# Altium PCB PCB1.PcbDoc (part 1 of 2)
Units mil, origin at the board's own origin, x right, y up, seen from the top; angles counter-clockwise.
Board outline 6000 x 4000 mil, 4 copper layers (Top Layer, Mid Layer 1, Mid Layer 2, Bottom Layer), stack 64.961 mil thick; 76 components, 53 nets, 288 pads, 57 vias.
Unrouted connection lines stored in the file: 62.
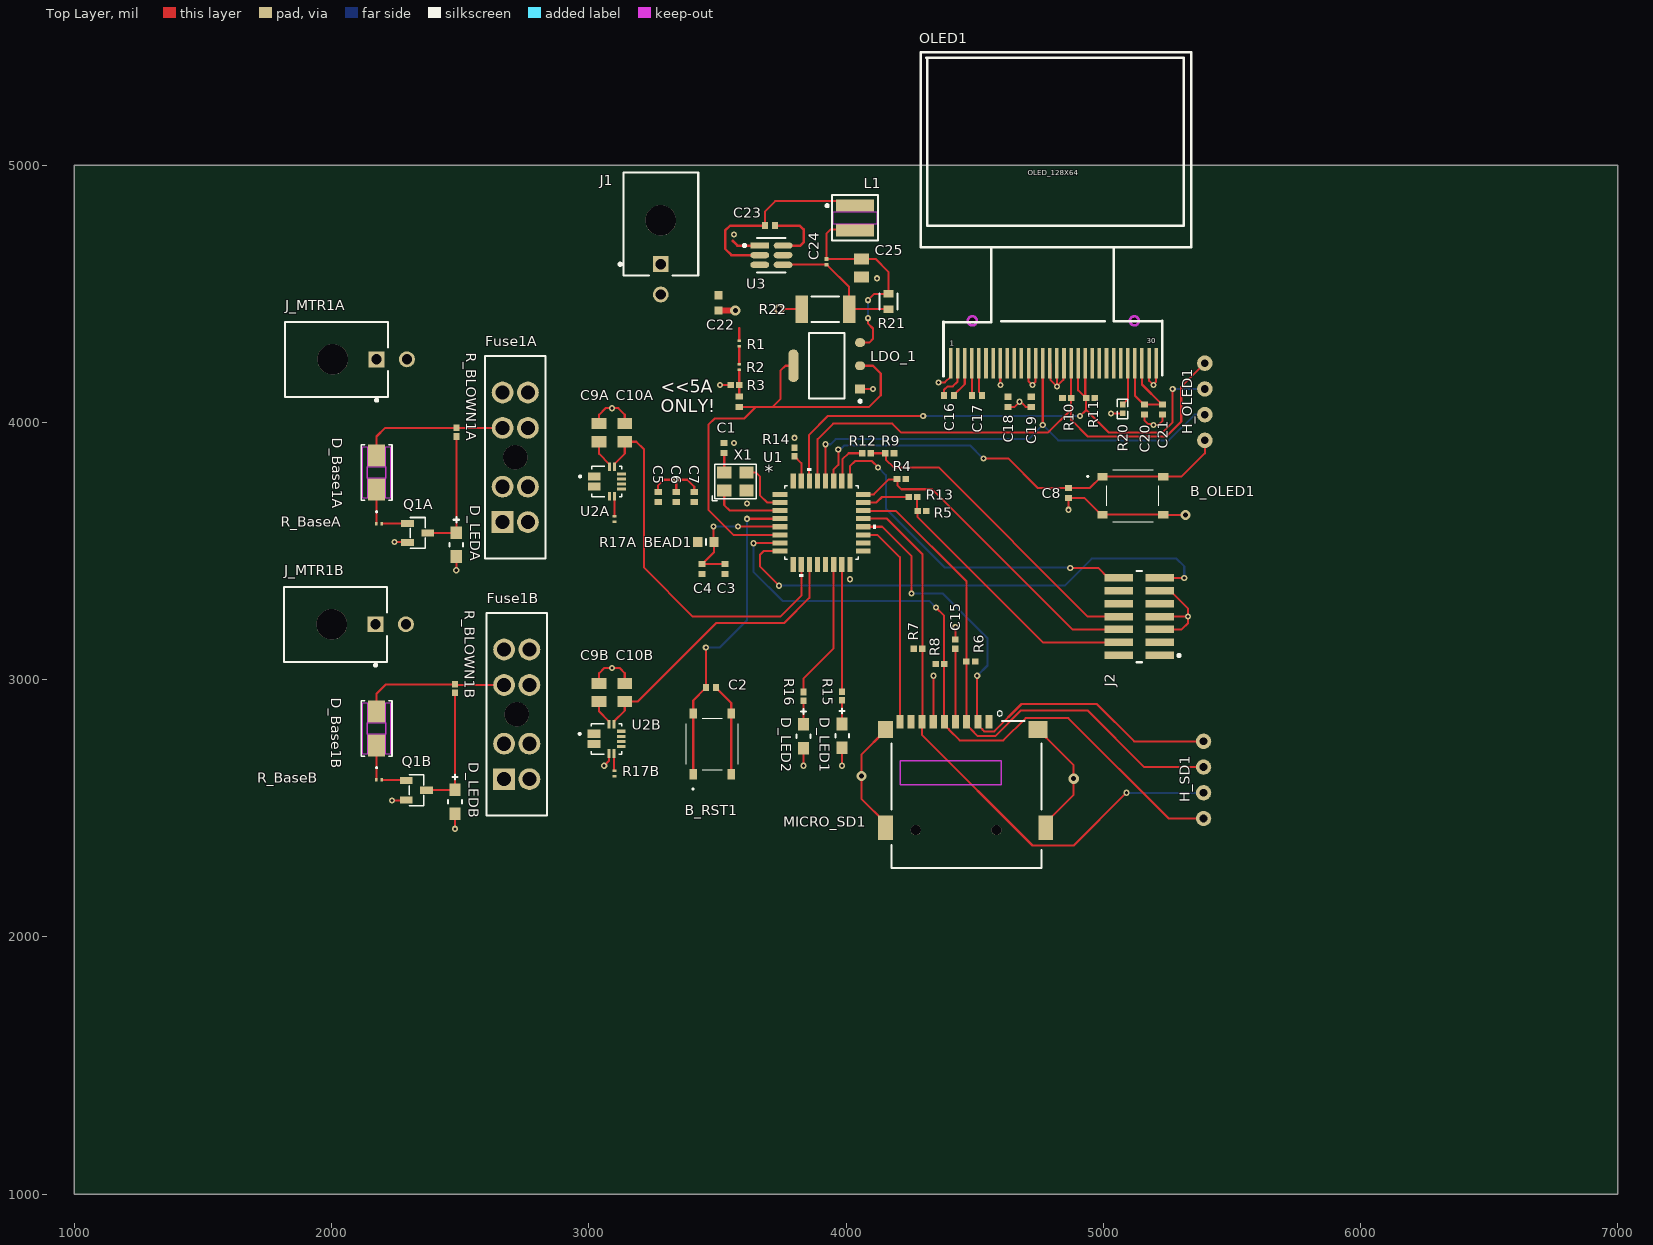
[diagram p0: Top Layer view]
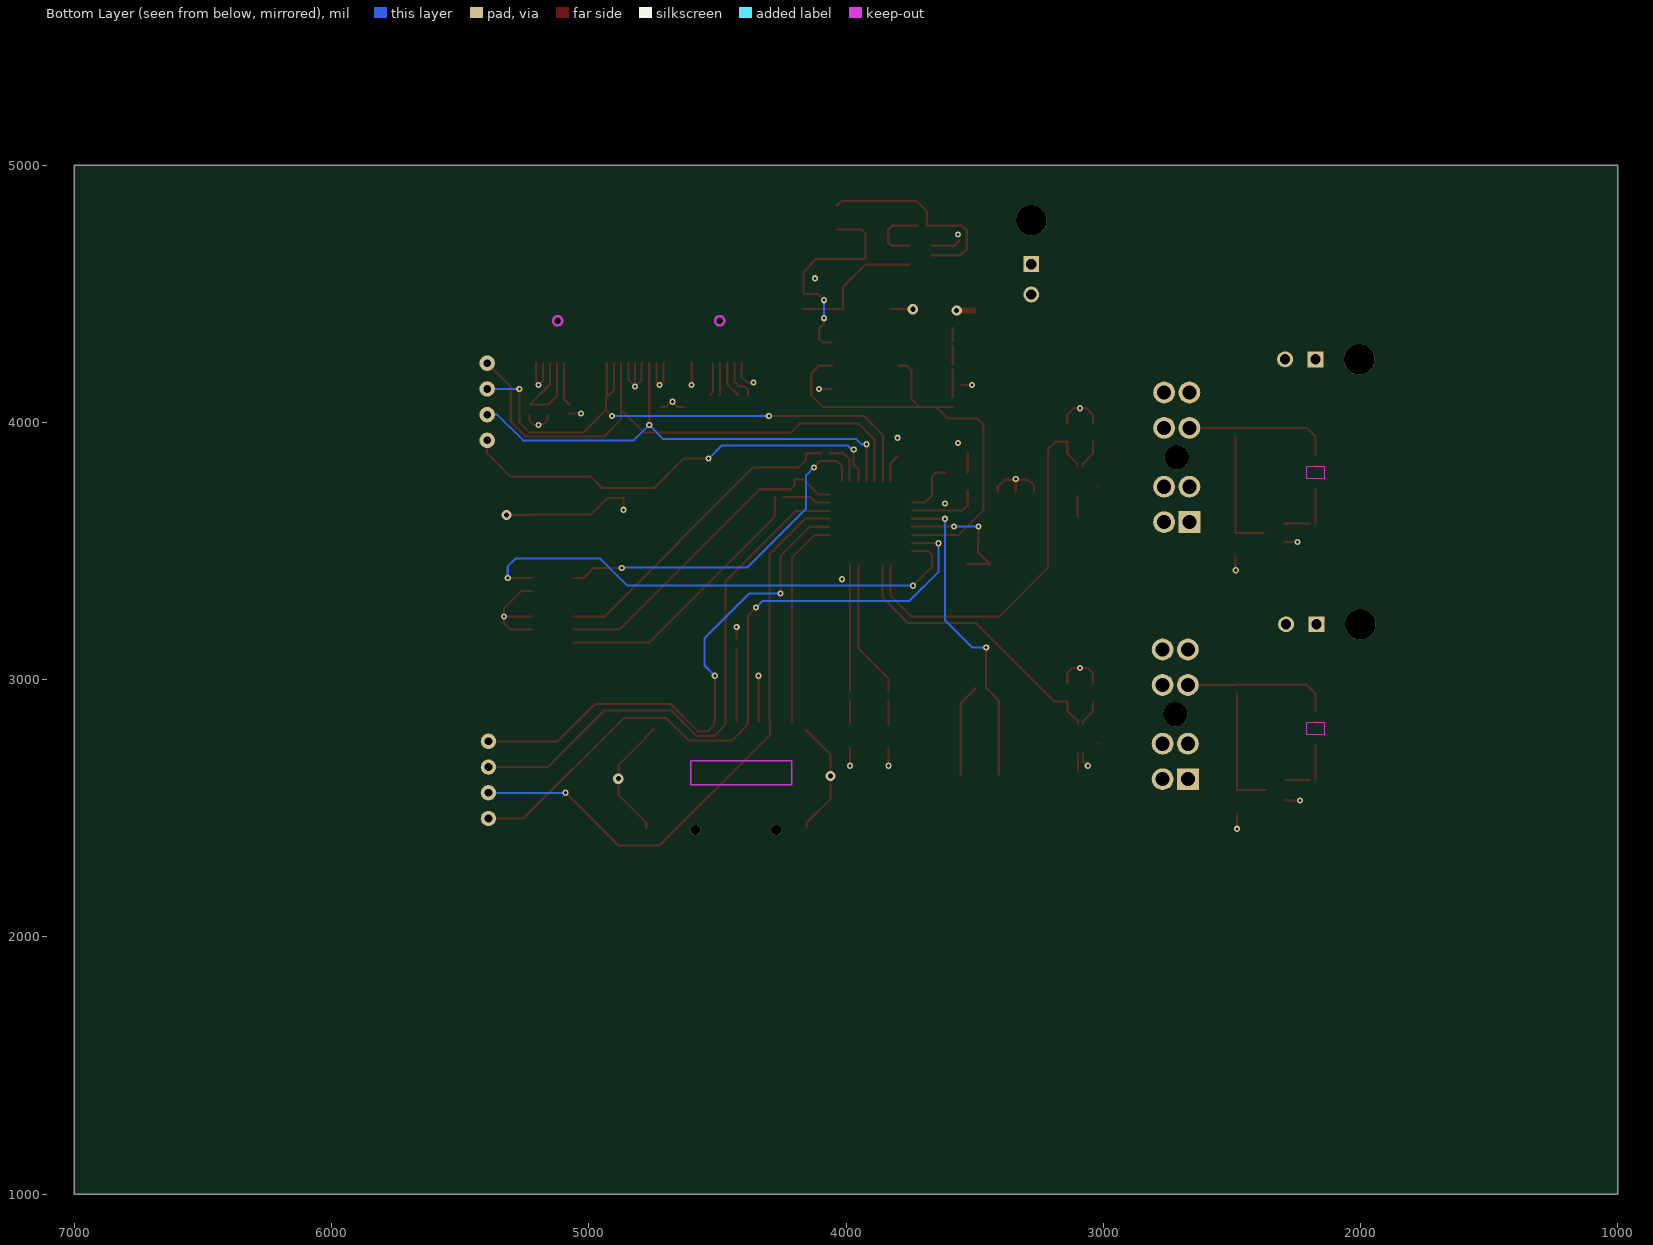
[diagram p1: Bottom Layer view, seen from below]
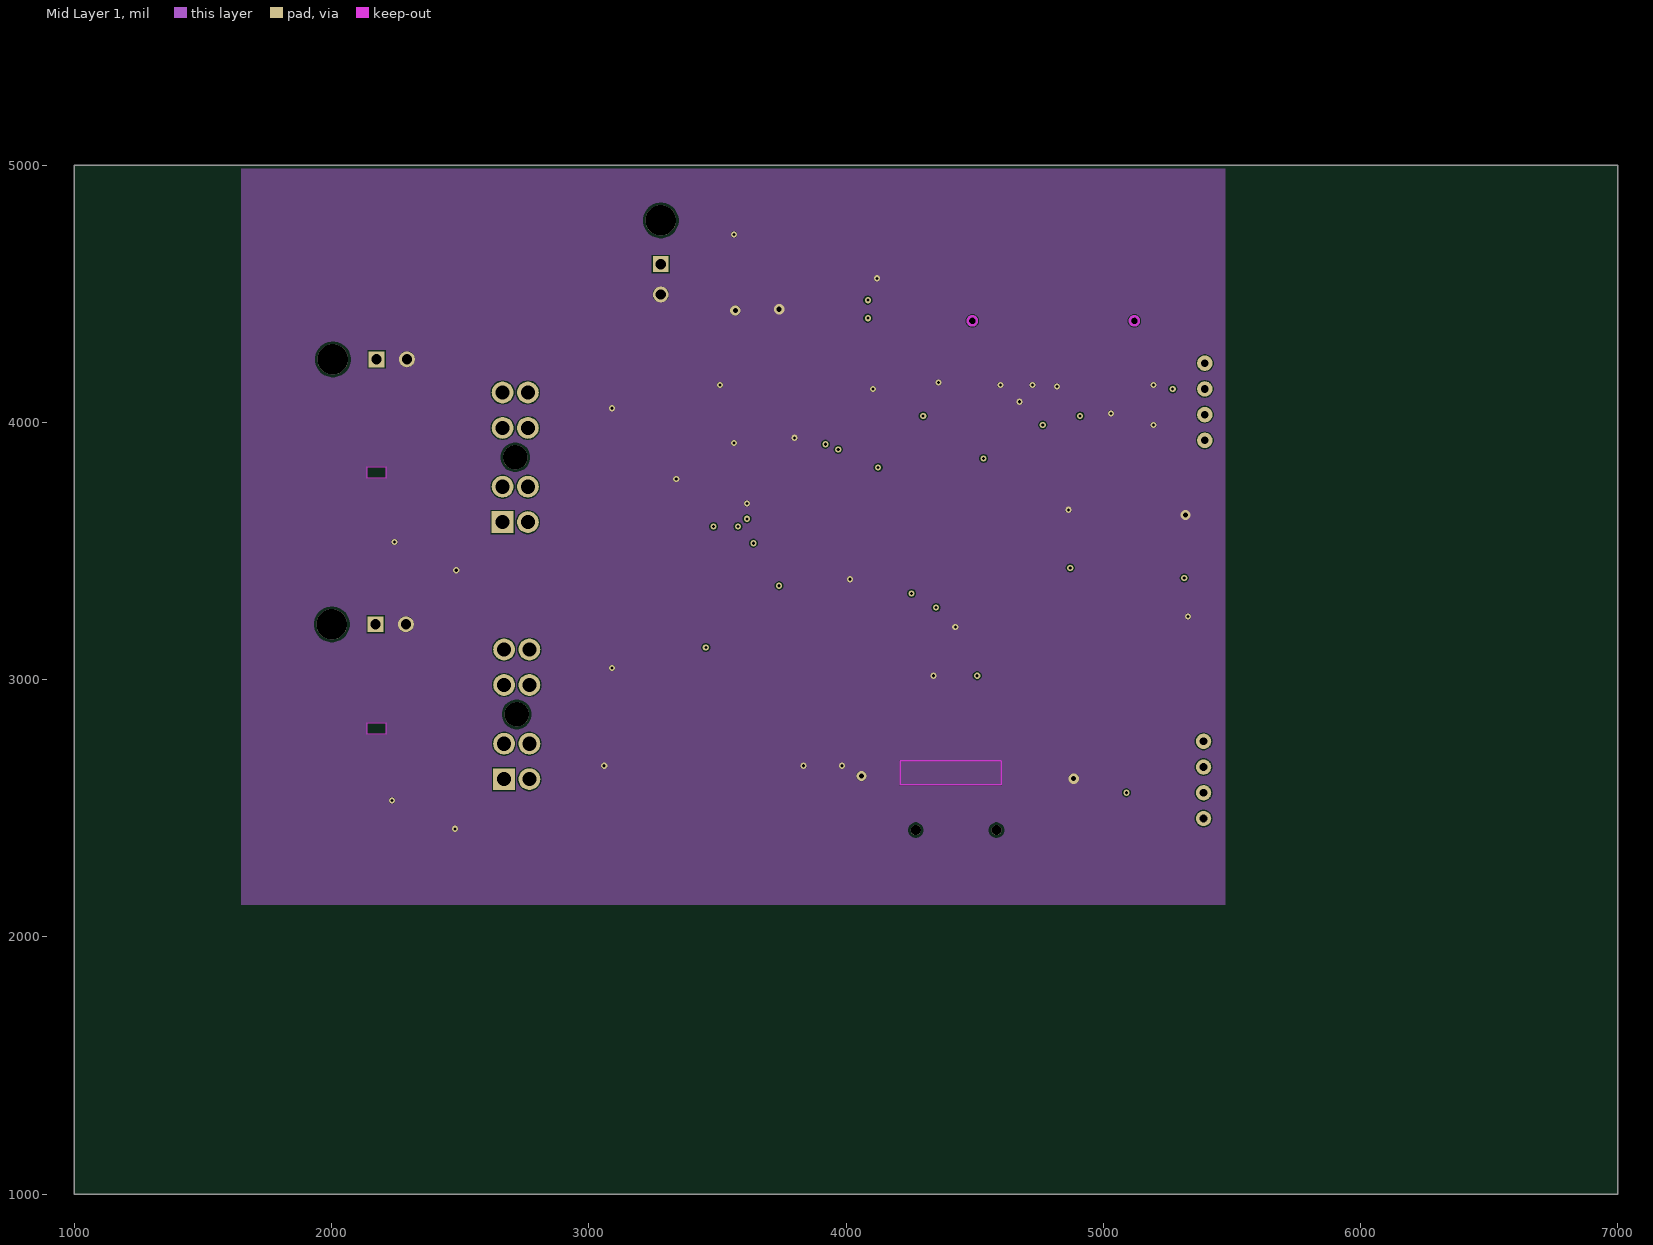
[diagram p2: Mid Layer 1]

## Layer stack, top to bottom
Top Solder: solder mask 0.5, Solder Resist, Dk 3.8
Top Layer: signal copper 2.9528
Dielectric 1: prepreg 3.937, 2313, Dk 4.05
Mid Layer 1: signal copper 0.689
Core: core 49.8031, FR-4, Dk 4.5
Mid Layer 2: signal copper 0.689
Dielectric 2: prepreg 3.937, 2313, Dk 4.05
Bottom Layer: signal copper 2.9528
Bottom Solder: solder mask 0.5, Solder Resist, Dk 3.8

## Board outline
1000,1000 7000,1000 7000,5000 1000,5000

## Design rules (kind name [scope] priority, off if disabled: settings)
BoardOutlineClearance [All] p1: gap=7.87 ignorepadtopadclearanceinfootprint=FALSE
Clearance ClearanceMidLayer1 [OnLayer('Mid Layer 1') Or IsVia Or IsThruPin vs OnLayer('Mid Layer 1')] p1: gap=4 ignorepadtopadclearanceinfootprint=FALSE except(5: Arc-Via Track-Via SMDPad-Via THPad-Via Via-Via Via-Fill Via-Poly Via-Region Via-Text; 9.84: Arc-Hole Track-Hole SMDPad-Hole THPad-Hole Via-Hole Fill-Hole Poly-Hole Region-Hole Text-Hole)
Clearance ClearanceTopLayer [OnLayer('Top Layer') Or IsVia Or IsThruPin vs OnLayer('Top Layer') Or IsVia Or IsThruPin] p2: gap=8 ignorepadtopadclearanceinfootprint=FALSE except(9.84: Arc-Hole Track-Hole SMDPad-Hole THPad-Hole Via-Hole Fill-Hole Poly-Hole Region-Hole Text-Hole)
Clearance ClearanceBottomLayer [OnLayer('Bottom Layer') Or IsVia Or IsThruPin vs OnLayer('Bottom Layer') Or IsVia Or IsThruPin] p3: gap=8 ignorepadtopadclearanceinfootprint=FALSE except(9.84: Arc-Hole Track-Hole SMDPad-Hole THPad-Hole Via-Hole Fill-Hole Poly-Hole Region-Hole Text-Hole)
Clearance ClearanceMidLayer2 [OnLayer('Mid Layer 2') Or IsVia Or IsThruPin vs OnLayer('Mid Layer 2')] p4: gap=4 ignorepadtopadclearanceinfootprint=FALSE except(5: Arc-Via Track-Via SMDPad-Via THPad-Via Via-Via Via-Fill Via-Poly Via-Region Via-Text; 9.84: Arc-Hole Track-Hole SMDPad-Hole THPad-Hole Via-Hole Fill-Hole Poly-Hole Region-Hole Text-Hole)
ComponentClearance [All] p1: gap=4 collisioncheckmode=3 verticalgap=4 showdistances=TRUE
DiffPairsRouting [All] p1: maxlimit=8 minlimit=4 mostfreqgap=8 toplayer_mingap=8 toplayer_minwidth=8 toplayer_maxwidth=71497.94 toplayer_prefwidth=8 midlayer1_maxgap=4 midlayer1_prefgap=4 midlayer1_minwidth=4 midlayer1_maxwidth=71497.94 midlayer1_prefwidth=4 midlayer2_maxgap=4 midlayer2_prefgap=4 midlayer2_minwidth=4 midlayer2_maxwidth=71497.94 midlayer2_prefwidth=4 bottomlayer_mingap=8 bottomlayer_minwidth=8 bottomlayer_maxwidth=71497.94 bottomlayer_prefwidth=8 maxuncoupledlength=500
Height [All] p1: minheight=0 maxheight=71497.94 prefheight=500
HoleSize [All] p1: absolutevalues=TRUE maxlimit=248.03 minlimit=7.87 maxpercent=80.000 minpercent=20.000
HoleToHoleClearance [All] p1: gap=9.84 allowstackedmicrovias=FALSE
MinimumAnnularRing [All] p1: minimumring=3
MinimumSolderMaskSliver [All] p1: minsoldermaskwidth=0
PlaneClearance PlaneClearanceMidLayer1 [OnLayer('Mid Layer 1')] p1: clearance=4
PlaneClearance PlaneClearanceMidLayer2 [OnLayer('Mid Layer 2')] p2: clearance=4
PlaneClearance PlaneClearanceTopLayer [OnLayer('Top Layer')] p3: clearance=8
PlaneClearance PlaneClearanceBottomLayer [OnLayer('Bottom Layer')] p4: clearance=8
PlaneConnect PlaneConnectPowerPads [InPadClass('PowerPads')] p1: planeconnectstyle=Direct reliefexpansion=20 reliefentries=4 reliefconductorwidth=10 reliefairgap=10
PlaneConnect PlaneConnectTopLayer [OnLayer('Top Layer')] p2: pad.planeconnectstyle=Relief pad.reliefexpansion=11.81 pad.reliefentries=4 pad.reliefconductorwidth=8 pad.reliefairgap=8 via.planeconnectstyle=Direct via.reliefexpansion=11.81 via.reliefentries=4 via.reliefconductorwidth=5 via.reliefairgap=5
PlaneConnect PlaneConnectBottomLayer [OnLayer('Bottom Layer')] p3: pad.planeconnectstyle=Relief pad.reliefexpansion=11.81 pad.reliefentries=4 pad.reliefconductorwidth=8 pad.reliefairgap=8 via.planeconnectstyle=Direct via.reliefexpansion=11.81 via.reliefentries=4 via.reliefconductorwidth=5 via.reliefairgap=5
PlaneConnect PlaneConnectMidLayer1 [OnLayer('Mid Layer 1')] p4: pad.planeconnectstyle=Relief pad.reliefexpansion=11.81 pad.reliefentries=4 pad.reliefconductorwidth=4 pad.reliefairgap=4 via.planeconnectstyle=Direct via.reliefexpansion=11.81 via.reliefentries=4 via.reliefconductorwidth=5 via.reliefairgap=5
PlaneConnect PlaneConnectMidLayer2 [OnLayer('Mid Layer 2')] p5: pad.planeconnectstyle=Relief pad.reliefexpansion=11.81 pad.reliefentries=4 pad.reliefconductorwidth=4 pad.reliefairgap=4 via.planeconnectstyle=Direct via.reliefexpansion=11.81 via.reliefentries=4 via.reliefconductorwidth=5 via.reliefairgap=5
PolygonConnect PolygonConnectPowerPads [All vs (InPadClass('PowerPads'))] p1: connectstyle=Direct reliefconductorwidth=10 reliefentries=4 polygonreliefangle="90 Angle" airgapwidth=10
PolygonConnect PolygonConnectMidLayer1 [OnLayer('Mid Layer 1') vs OnLayer('Mid Layer 1')] p2: thpad.connectstyle=Relief thpad.reliefconductorwidth=4 thpad.reliefentries=4 thpad.polygonreliefangle="90 Angle" thpad.airgapwidth=4 smdpad.connectstyle=Relief smdpad.reliefconductorwidth=4 smdpad.reliefentries=4 smdpad.polygonreliefangle="90 Angle" smdpad.airgapwidth=4 via.connectstyle=Direct via.reliefconductorwidth=5 via.reliefentries=4 via.polygonreliefangle="90 Angle" via.airgapwidth=5
PolygonConnect PolygonConnectMidLayer2 [OnLayer('Mid Layer 2') vs OnLayer('Mid Layer 2')] p3: thpad.connectstyle=Relief thpad.reliefconductorwidth=4 thpad.reliefentries=4 thpad.polygonreliefangle="90 Angle" thpad.airgapwidth=4 smdpad.connectstyle=Relief smdpad.reliefconductorwidth=4 smdpad.reliefentries=4 smdpad.polygonreliefangle="90 Angle" smdpad.airgapwidth=4 via.connectstyle=Direct via.reliefconductorwidth=5 via.reliefentries=4 via.polygonreliefangle="90 Angle" via.airgapwidth=5
PolygonConnect PolygonConnectTopLayer [OnLayer('Top Layer') vs OnLayer('Top Layer')] p4: thpad.connectstyle=Relief thpad.reliefconductorwidth=8 thpad.reliefentries=4 thpad.polygonreliefangle="90 Angle" thpad.airgapwidth=8 smdpad.connectstyle=Relief smdpad.reliefconductorwidth=8 smdpad.reliefentries=4 smdpad.polygonreliefangle="90 Angle" smdpad.airgapwidth=8 via.connectstyle=Direct via.reliefconductorwidth=5 via.reliefentries=4 via.polygonreliefangle="90 Angle" via.airgapwidth=5
PolygonConnect PolygonConnectBottomLayer [OnLayer('Bottom Layer') vs OnLayer('Bottom Layer')] p5: thpad.connectstyle=Relief thpad.reliefconductorwidth=8 thpad.reliefentries=4 thpad.polygonreliefangle="90 Angle" thpad.airgapwidth=8 smdpad.connectstyle=Relief smdpad.reliefconductorwidth=8 smdpad.reliefentries=4 smdpad.polygonreliefangle="90 Angle" smdpad.airgapwidth=8 via.connectstyle=Direct via.reliefconductorwidth=5 via.reliefentries=4 via.polygonreliefangle="90 Angle" via.airgapwidth=5
RoutingVias [All] p1: holewidth=7.87 width=17.72 viastyle="Through Hole" minholewidth=7.87 minwidth=17.72 maxholewidth=248.03 maxwidth=257.87
SilkToSilkClearance [All] p1: silktosilkclearance=0
SilkToSolderMaskClearance [IsPad] p1: minsilkscreentomaskgap=4 clearancetoexposedcopper=TRUE
SolderMaskExpansion [All] p1: expansion=2.95 istentingtop=FALSE
SupplyNets "Schematic Supply Nets_3" [InNet('3V3')] p1: voltage=0.000
SupplyNets "Schematic Supply Nets_2" [InNet('26V1')] p2: voltage=0.000
SupplyNets "Schematic Supply Nets_1" [InNet('GND')] p3: voltage=0.000
SupplyNets "Schematic Supply Nets" [InNet('AVDD')] p4: voltage=0.000
Width [All] p1: maxlimit=71497.94 minlimit=4 preferedwidth=8 toplayer_minwidth=8 midlayer1_prefwidth=4 midlayer2_prefwidth=4 bottomlayer_minwidth=8 minimp=50.000000 maximp=50.000000 favimp=50.000000
20 further rules are at their usual default settings.

## Classes and differential pairs
channel class Fuse: F1 F2
channel class Ammeter: I1 I2
net class Vi_motor[1..2]: Vi_motor1 Vi_motor2
component class Power: J1 R1 R2 R3
component class MCU: B_OLED1 B_RST1 BEAD1 C1 C2 C3 C4 C5 C6 C7 C8 D5 D6 D_LED1 D_LED2 H_OLED1 H_SD1 R4 R5 R6 R7 R8 R9 R10 R11 R12 R13 R14 R15 R16 U1 X1
component class "Mass Storage": C15 MICRO_SD1
component class I2: C9B C10B R17B U2B
component class I1: C9A C10A R17A U2A
component class F2: D1B D_Base1B D_LEDB Fuse1B J_MTR1B Q1B R_BaseB R_BLOWN1B
component class F1: D1A D_Base1A D_LEDA Fuse1A J_MTR1A Q1A R_BaseA R_BLOWN1A
component class Debugger: J2
component class Buck+LDO: C22 C23 C24 C25 L1 LDO_1 R21 R22 U3
component class "128x64 OLED": C16 C17 C18 C19 C20 C21 OLED1 R20

## Components (designator, comment, footprint, x,y, rotation, side; value= is the part's Value field where it differs from the comment)
B_OLED1 "Button" TS1187ABAB 5115,3715 r0 top (schematic designator B_OLED_ON/OFF1)
B_RST1 "Button" TS1187ABAB 3480,2750 r90 top
BEAD1 "GZ1608D601TF" BEADC1608X95N 3455,3535 r0 top
C1 "CL05B103KB5NNNC" CAP-0402 3525,3900 r270 top
C2 "CL05B104KB54PNC" CAP-0402 3475,2970 r180 top
C3 "CL05A105KA5NQNC" CAP-0402 3530,3430 r90 top
C4 "CL05B103KB5NNNC" CAP-0402 3440,3430 r90 top
C5 "CL05A475MP5NRNC" CAP-0402 3270,3710 r270 top
C6 "CL05B104KO5NNNC" CAP-0402 3340,3710 r270 top
C7 "CL05B104KO5NNNC" CAP-0402 3410,3709.69 r270 top
C8 "CL05B103KB5NNNC" CAP-0402 4865,3725 r90 top
C9A "CC0805KRX7R9BB104" CAP-0805 3040,3960 r270 top (schematic designator C9)
C9B "CC0805KRX7R9BB104" CAP-0805 3040,2950 r270 top (schematic designator C9)
C10A "CL21B102KBCNNNC" CAP-0805 3140,3960 r270 top (schematic designator C10)
C10B "CL21B102KBCNNNC" CAP-0805 3140,2950 r270 top (schematic designator C10)
C15 "0.1uF Ceramic Capacitor" CAPC1005X55N 4425,3138.11 r90 top value=0.1uF
C16 "CL05A225MQ5NSNC" CAP-0402 4400,4105 r180 top
C17 "CL05A225MQ5NSNC" CAP-0402 4509.69,4105 r180 top
C18 "CL05B104KO5NNNC" CAP-0402 4630,4080 r90 top
C19 "CL05A106MQ5NUNC" CAP-0402 4720,4080 r90 top
C20 "CL05A106MQ5NUNC" CAP-0402 5160,4049.68 r90 top
C21 "CL05A106MQ5NUNC" CAP-0402 5230,4050 r90 top
C22 "885012106009" WCAP-CSGP_0603_L1.6W0.8H0.8_Reflow 3505,4464.53 r90 top
C23 "CL05B104KO5NNNC" CAP-0402 3705,4765 r180 top
C24 "CGA1A2C0G1E680J030BA" CAPC0603X33N 3925,4623.94 r90 top
C25 "CL21A476MQYNNNE" CAP-0805 4060,4600 r90 top
D_Base1A "Diode" M7_MDD 2175,3805 r90 top (schematic designator D_Base1)
D_Base1B "Diode" M7_MDD 2175,2810 r90 top (schematic designator D_Base1)
D_LED1 "" FP-AP2012EC-MFG 3985,2781.26 r270 top
D_LED2 "" FP-AP2012EC-MFG 3835,2780 r270 top
D_LEDA "" FP-AP2012EC-MFG 2485,3525 r270 top (schematic designator D_LED)
D_LEDB "" FP-AP2012EC-MFG 2480,2525 r270 top (schematic designator D_LED)
Fuse1A "178.6165.0002" FP-178_6165-MFG 2714.21,3864.17 r90 top (schematic designator Fuse1)
Fuse1B "178.6165.0002" FP-178_6165-MFG 2720,2865 r90 top (schematic designator Fuse1)
H_OLED1 "4-pin Header" "4-pin Header" 5395,4230 r180 top
H_SD1 "4-pin Header" "4-pin Header" 5390,2460 r0 top
J1 "43045-0201" FP-43045-0201-MFG 3280,4771.1 r180 top
J2 "FTSH-107-01-L-DV-K" FP-FTSH-107-01-L-DV-K-MFG 5140,3245 r90 top
J_MTR1A "43045-0201" FP-43045-0201-MFG 2018.9,4245 r270 top (schematic designator J_MTR1)
J_MTR1B "43045-0201" FP-43045-0201-MFG 2015,3215 r270 top (schematic designator J_MTR1)
L1 "74439325056" WE-XHMI_4040 4035,4795 r0 top
LDO_1 "AMS1117-3.3" FP-AMS1117-IPC_C 3925,4220 r180 top
MICRO_SD1 "TF-01A" TF-01A 4468,2554 r0 top
OLED1 "N096-2864KSWEG01-H30" OLED_0.96-30P-P0.70-12864 4806.1,4229.99 r0 top
Q1A "SS8050" SOT-23-3_L2.9-W1.3-P1.90-LS2.4-BR 2335,3570 r180 top (schematic designator Q1)
Q1B "SS8050" SOT-23-3_L2.9-W1.3-P1.90-LS2.4-BR 2330,2570 r180 top (schematic designator Q1)
R1 "0603WAF3003T5E" RES-0603 3585,4305.83 r90 top
R2 "0603WAF5103T5E" RES-0603 3585,4215.83 r90 top
R3 "0402WGF1003TCE" RES-0402 3568.27,4145 r0 top
R4 "0402WGF1002TCE" RES-0402 4215,3780 r0 top
R5 "0402WGF1002TCE" RES-0402 4295,3655 r0 top
R6 "0402WGF1002TCE" RES-0402 4485,3070 r0 top
R7 "0402WGF1002TCE" RES-0402 4280,3120 r180 top
R8 "0402WGF1002TCE" RES-0402 4365,3060 r180 top
R9 "0402WGF1002TCE" RES-0402 4170,3880 r0 top
R10 "0402WGF1002TCE" RES-0402 4858.27,4095 r180 top
R11 "0402WGF1002TCE" RES-0402 4950,4095 r0 top
R12 "0402WGF220JTCE" RES-0402 4080,3880 r0 top
R13 "0402WGF220JTCE" RES-0402 4260,3710 r0 top
R14 "0402WGF1002TCE" RES-0402 3800,3885 r270 top
R15 "0402WGF1000TCE" RES-0402 3985,2936.73 r270 top
R16 "0402WGF1000TCE" RES-0402 3835,2935 r270 top
R17A "0603WAF1001T5E" RES-0603 3100,3624.17 r270 top (schematic designator R17)
R17B "0603WAF1001T5E" RES-0603 3100,2635 r270 top (schematic designator R17)
R20 "390kΩ" R0402 5075,4052.04 r90 top
R21 "" FP-CRCW0603-e3-MFG 4165,4470 r270 top
R22 "13K7 1% 2010(5025)" RESC2010(5025)_N 3920,4440 r0 top value="13700.00 Ohm"
R_BaseA "0603WAF1002T5E" RES-0603 2185,3605 r180 top (schematic designator R_Base)
R_BaseB "0603WAF1002T5E" RES-0603 2185,2610 r180 top (schematic designator R_Base)
R_BLOWN1A "0402WGF1202TCE" RES-0402 2485,3961.73 r90 top (schematic designator R_BLOWN1)
R_BLOWN1B "0402WGF1202TCE" RES-0402 2480,2965 r90 top (schematic designator R_BLOWN1)
U1 "STM32L412KBT6" LQFP-32 3905,3610 r0 top
U2A "ACS711KEXLT-15AB-T" XDCR_ACS711KEXLT-15AB-T 3070,3770 r0 top (schematic designator U2)
U2B "ACS711KEXLT-15AB-T" XDCR_ACS711KEXLT-15AB-T 3068.62,2769.68 r0 top (schematic designator U2)
U3 "" FP-DDC0006A-IPC_A 3710,4650 r0 top
X1 "32.768kHz" OSC-SMD_4P-L3.2-W2.5-BL 3570,3770 r0 top

## Footprints (in the part's own frame and the unit in brackets; to place one, negate y for a bottom-side part, rotate by r counter-clockwise, add the part's x,y. Pads: shape width x height; smd on the part's side, far side on the other; paste and mask are expansions set on the pad)
"4-pin Header" [mil]
  round 60 hole 30: 1(0,0) 2(0,100) 3(0,200) 4(0,300)
BEADC1608X95N [mm]
  rect 0.9x1 smd: 1(-0.8,0) 2(0.8,0)
  silkscreen extent 0,-0.3 0,0.3, body extent -0.8,-0.4 0.8,0.4, height 0.95
CAP-0402 [mm]
  rect 0.6x0.7 smd: 1(-0.5,0) 2(0.5,0)
  body extent -0.5,-0.25 0.5,0.25, height 0.3
CAP-0805 [mm] "Chip Capacitor, 2-Leads, Body 2.00x1.25mm, IPC Medium Density"
  rect 1.1x1.45 smd: 1(-0.9,0) 2(0.9,0)
  body extent -1.05,-0.7 1.05,0.7, height 0.6
CAPC0603X33N [mm]
  rect 0.38x0.4 smd: 1(-0.281,0) 2(0.281,0)
  body extent -0.3,-0.15 0.3,0.15, height 0.33
CAPC1005X55N [mm]
  rect 0.6x0.62 smd: 1(-0.46,0) 2(0.46,0)
  body extent -0.5,-0.25 0.5,0.25, height 0.55
FP-178_6165-MFG [mm]
  round 2.15 hole 1.4 paste-2539.97 mask+0: 1(-6.4,-1.25) 1(-2.9,-1.25) 1(-2.9,1.25) 2(2.9,-1.25) 2(2.9,1.25) 2(6.4,-1.25) 2(6.4,1.25)
  rect 2.15x2.15 hole 1.4 paste-2539.97 mask+0: 1(-6.4,1.25)
  round 2.4 hole 2.4 unplated paste-2539.97 mask+0: ""(0,0)
  silkscreen extent -10,-3 10,3, body extent -10.1,-3.1 10.1,3.1, height 0.25
FP-43045-0201-MFG [mm]
  rect 1.57x1.57 hole 1.02 paste-2539.97 mask+0: 1(0,3.965)
  round 1.57 hole 1.02 paste-2539.97 mask+0: 2(0,6.965)
  round 3 hole 3 unplated paste-2539.97 mask+0: ""(0,-0.355)
  silkscreen extent -3.7,-5.08 4.15,5.08, body extent -3.8,-5.18 3.8,7.85, height 0.25
FP-AMS1117-IPC_C [mm]
  rect 1.004x0.872 smd paste+0 mask+0: 1(-3.295,2.29)
  rrect100% 1.004x0.872 smd paste+0 mask+0: 2(-3.295,0) 3(-3.295,-2.29)
  rrect87% 1.004x3.182 smd paste+0 mask+0: 4(3.295,0)
  silkscreen extent -3.42,-3.25 1.75,3.62, body extent -3.9,-3.35 3.9,3.35, height 0.25
FP-AP2012EC-MFG [mm]
  rect 1.25x1.1 smd paste+0 mask+0: 1(-1.175,0) 2(1.175,0)
  silkscreen extent -2.7,-0.67 0.18,0.67, body extent -1.9,-0.77 1.9,0.77, height 0.25
FP-CRCW0603-e3-MFG [mm]
  rect 0.75x1 smd paste+0 mask+0: 1(-0.75,0) 2(0.75,0)
  silkscreen extent -0.8,-0.9 0.8,0.9, body extent -1.22,-0.6 1.22,0.6, height 0.25
FP-DDC0006A-IPC_A [mm]
  rect 1.854x0.612 smd paste+0 mask+0: 1(-1.15,0.95)
  rrect100% 1.854x0.612 smd paste+0 mask+0: 2(-1.15,0) 3(-1.15,-0.95) 4(1.15,-0.95) 5(1.15,0) 6(1.15,0.95)
  silkscreen extent -2.77,-1.7 1.4,1.7, body extent -2.58,-1.95 2.58,1.95, height 0.25
FP-FTSH-107-01-L-DV-K-MFG [mm]
  rect 0.74x2.79 smd paste+0 mask+0: 1(-3.81,-2.035) 2(-3.81,2.035) 3(-2.54,-2.035) 4(-2.54,2.035) 5(-1.27,-2.035) 6(-1.27,2.035) 7(0,-2.035) 8(0,2.035) 9(1.27,-2.035) 10(1.27,2.035) 11(2.54,-2.035) 12(2.54,2.035) 13(3.81,-2.035) 14(3.81,2.035)
  silkscreen extent -4.51,-4.04 4.51,0.27, body extent -4.61,-3.53 4.61,3.53, height 0.25
LQFP-32 [mil]
  rect 58x20 smd paste+0 mask+0: 1(-162,110.24) 2(-162,78.74) 3(-162,47.24) 4(-162,15.75) 5(-162,-15.75) 6(-162,-47.24) 7(-162,-78.74) 8(-162,-110.24) 17(162,-110.24) 18(162,-78.74) 19(162,-47.24) 20(162,-15.75) 21(162,15.75) 22(162,47.24) 23(162,78.74) 24(162,110.24)
  rect 20x58 smd paste+0 mask+0: 9(-110.24,-162) 10(-78.74,-162) 11(-47.24,-162) 12(-15.75,-162) 13(15.75,-162) 14(47.24,-162) 15(78.74,-162) 16(110.24,-162) 25(110.24,162) 26(78.74,162) 27(47.24,162) 28(15.75,162) 29(-15.75,162) 30(-47.24,162) 31(-78.74,162) 32(-110.24,162)
  silkscreen extent -143,-211 211,211, body extent -177,-177 177,177, height 63
M7_MDD [mil]
  rect 85x67 smd paste+0 mask+0: 1(-66,0) 2(66,0)
  Top Layer keep-out region: -21.5,-35.5 -21.5,35.5 21.5,35.5 21.5,-35.5
  Top Layer keep-out region: -100.5,35.5 -100.5,53 100.5,53 100.5,35.5
  Top Layer keep-out region: -100.5,-53 -100.5,-35.5 100.5,-35.5 100.5,-53
  Keep-Out Layer region: -21.5,-35.5 -21.5,35.5 21.5,35.5 21.5,-35.5
  silkscreen extent -155,-60 108,60, body extent -103,-55 103,55, height 89
OLED_0.96-30P-P0.70-12864 [mm]
  rect 0.351x3 smd: 1(-10.15,0.002) 2(-9.45,0) 3(-8.75,0) 4(-8.05,0) 5(-7.35,0) 6(-6.65,0) 7(-5.95,0) 8(-5.25,0) 9(-4.55,0) 10(-3.85,0) 11(-3.15,0) 12(-2.45,0) 13(-1.75,0) 14(-1.05,0) 15(-0.35,0) 16(0.35,0) 17(1.05,0) 18(1.75,0) 19(2.45,0) 20(3.15,0) 21(3.85,0) 22(4.55,0) 23(5.25,0) 24(5.95,0) 25(6.65,0) 26(7.35,0) 27(8.05,0) 28(8.75,-0.001) 29(9.45,-0.002) 30(10.15,-0.002)
  Keep-Out Layer board cut-out: 8.45,4.18 8.449,4.269 8.379,4.431 8.252,4.555 8.089,4.623 7.912,4.623 7.748,4.556 7.621,4.431 7.552,4.269 7.55,4.18 7.552,4.092 7.621,3.929 7.748,3.805 7.911,3.738 8.089,3.738 8.252,3.805 8.379,3.929 8.448,4.092 8.45,4.18 8.45,4.18
  Keep-Out Layer board cut-out: -7.55,4.18 -7.551,4.269 -7.621,4.431 -7.747,4.555 -7.911,4.623 -8.088,4.623 -8.252,4.556 -8.379,4.431 -8.448,4.269 -8.45,4.18 -8.448,4.092 -8.379,3.929 -8.252,3.805 -8.089,3.738 -7.911,3.738 -7.748,3.805 -7.621,3.929 -7.551,4.092 -7.55,4.18 -7.55,4.18
  Keep-Out Layer circle w0.254: c8,4.18 r0.45
  Keep-Out Layer circle w0.025: c8,4.18 r0.45
  Keep-Out Layer circle w0.254: c-8,4.18 r0.45
  Keep-Out Layer circle w0.025: c-8,4.18 r0.45
  silkscreen extent -13.1,-1.3 13.6,30.7
OSC-SMD_4P-L3.2-W2.5-BL [mm]
  rect 1.4x1.2 smd: 1(-1.1,-0.875) 2(1.1,-0.875) 3(1.1,0.875) 4(-1.1,0.875)
  silkscreen extent -2.29,-1.9 2.07,1.72
R0402 [mm]
  rect 0.566x0.54 smd paste-100 mask+0.051: 1(-0.433,0) 2(0.433,0)
  silkscreen extent -0.94,-0.5 0.94,0.5
RES-0402 [mm] "Chip Resistor, 2-Leads, Body 1.00x0.50mm, IPC Medium Density"
  rect 0.65x0.6 smd: 1(-0.425,0) 2(0.425,0)
  body extent -0.55,-0.3 0.55,0.3, height 0.6
RES-0603 [mm]
  rect 0.25x0.35 smd: 1(-0.275,0) 2(0.275,0)
  body extent -0.3,-0.15 0.3,0.15, height 0.3
RESC2010(5025)_N [mm] "Chip Resistor, Body 5.0x2.5mm, IPC Medium Density"
  rect 1.25x2.7 smd: 1(-2.35,0) 2(2.35,0)
  silkscreen extent -1.35,-1.25 1.35,1.25, body extent -2.6,-1.35 2.6,1.35, height 0.71
SOT-23-3_L2.9-W1.3-P1.90-LS2.4-BR [mm]
  rect 1.25x0.7 smd: 1(1,-0.95) 2(1,0.95) 3(-1,0)
  silkscreen extent -0.73,-1.53 0.73,1.53
TF-01A [mm]
  rect 0.7x1.3 smd: 1(2.23,7.174) 2(1.13,7.174) 3(0.03,7.174) 4(-1.07,7.174) 5(-2.17,7.174) 6(-3.27,7.174) 7(-4.37,7.174) 8(-5.47,7.174) CD1(-6.57,7.174)
  rect 1.448x1.651 smd: MP1(-7.989,6.4)
  rect 1.448x2.438 smd: MP2(-7.989,-3.3) MP3(7.836,-3.3)
  rect 1.854x1.651 smd: MP4(7.061,6.4)
  round 1 hole 1 unplated: ""(-5.004,-3.531) ""(2.972,-3.531)
  Keep-Out Layer lines w0.127: -6.528,0.94 3.429,0.94 3.429,3.302 -6.528,3.302 -6.528,0.94
  silkscreen extent -7.4,-7.26 7.4,8.24, body extent -7.05,-4.01 9.05,11.19, height 2
TS1187ABAB [mm]
  rect 1x0.75 smd: A1(-3,1.875) B1(3,1.875) C1(-3,-1.875) D1(3,-1.875)
  silkscreen extent -4.5,-2.55 2.55,2.55, body extent -3.2,-2.55 3.3,2.55, height 1.5
WCAP-CSGP_0603_L1.6W0.8H0.8_Reflow [mm] "Ceramic Capacitors, body 1.6x0.8mm"
  rect 0.8x0.8 smd: 1(-0.75,0) 2(0.75,0)
  body extent -0.8,-0.4 0.8,0.4, height 0.8
WE-XHMI_4040 [mm] "SMD Power Inductor, body 4.30 x 4.30 mm"
  rect 3.8x1.2 smd: 1(0,1.225) 2(0,-1.225)
  Top Layer keep-out region: -2.15,0.625 2.15,0.625 2.15,-0.625 -2.15,-0.625
  silkscreen extent -2.87,-2.25 2.25,2.25, body extent -2.15,-2.15 2.15,2.15, height 4.11
XDCR_ACS711KEXLT-15AB-T [mm]
  rect 1.27x0.8 smd mask+0: 1(-1.235,0.5) 3(-1.235,-0.5)
  rect 0.3x0.85 smd mask+0.05: 5(0.25,-1.45) 6(0.75,-1.45) 11(0.75,1.45) 12(0.25,1.45)
  rect 0.85x0.3 smd mask+0.05: 7(1.45,-0.75) 8(1.45,-0.25) 9(1.45,0.25) 10(1.45,0.75)
  silkscreen extent -2.73,-1.5 1.5,1.5, body extent -1.5,-1.5 1.5,1.5, height 0.8

## Part data
B_OLED1 B_RST1: library part TS-1187A-B-A-B, Manufacturer_Name="XKB Connectivity", Datasheet Link=http://www.helloxkb.com/public/images/pdf/TS-1187A-X-X-X.pdf, Height=4.05mm, Manufacturer_Part_Number=TS-1187A-B-A-B
BEAD1: "Ferrite Bead", Manufacturer_Name=SUNLORD, Datasheet Link=https://datasheet.lcsc.com/szlcsc/Sunlord-GZ1608D601TF_C1002.pdf, Height=0.95mm, Manufacturer_Part_Number=GZ1608D601TF
C1 C4 C8: "Capacitor, Ceramic (MLCC), 10nF, ±10%, 50V, X7R, ±10%, SMD 0402", Capacitance=10nF, Capacitance @ 1.2V DC Bias=10.434nF, Capacitance @ 1.5V DC Bias=10.455nF, Capacitance @ 1.8V DC Bias=10.480nF, Capacitance @ 1.35V DC Bias=10.444nF, Capacitance @ 1V DC Bias=10.426nF, Capacitance @ 2.5V DC Bias=10.514nF, Capacitance @ 3.3V DC Bias=10.519nF, Capacitance @ 3.7V DC Bias=10.504nF, Capacitance @ 4.2V DC Bias=10.473nF, Capacitance @ 5V DC Bias=10.402nF, Capacitance @ 9V DC Bias=10.052nF, Capacitance @ 12V DC Bias=9.639nF, Capacitance @ 15V DC Bias=9.187nF, Capacitance @ 24V DC Bias=7.606nF, Capacitance @ 36V DC Bias=5.499nF, Capacitance @ 48V DC Bias=3.591nF, JLCPCB Basic Part=Yes, JLCPCB Part Number=C15195, Manufacturer="Samsung Electro-Mechanics", Package Size=0402, Temperature Coefficient=X7R, Temperature Rating="-55°C ~ 125°C", Tolerance=±10%, Voltage Rating=50V, Category="Capacitors - MLCC", ComponentLink1Description=Datasheet, ComponentLink1URL=https://wmsc.lcsc.com/wmsc/upload/file/pdf/v2/lcsc/2304140030_Samsung-Electro-Mechanics-CL05B103KB5NNNC_C15195.pdf, ComponentLink2Description="JLCPCB Part URL", ComponentLink2URL=https://jlcpcb.com/partdetail/C15195, ComponentLink3Description="LCSC Part URL", ComponentLink3URL=https://lcsc.com/product-detail/Multilayer-Ceramic-Capacitors-MLCC---SMD-SMT_Samsung-Electro-Mechanics-Samsung-Electro-Mechanics-CL05B103KB5NNNC_C15195.html, ComponentLink4Description="Samsung Component Library", ComponentLink4URL=https://weblib.samsungsem.com/mlcc/mlcc-ec.do?partNumber=CL05B103KB5NNN, Impedance (0V Bias) @ 1GHz=1.42Ω, Impedance (0V Bias) @ 1kHz=1.61E+04Ω, Impedance (0V Bias) @ 1MHz=17.3Ω, Impedance (0V Bias) @ 2GHz=3.22Ω, Impedance (0V Bias) @ 5GHz=6.48Ω, Impedance (0V Bias) @ 5kHz=3.27E+03Ω, Impedance (0V Bias) @ 5MHz=3.52Ω, Impedance (0V Bias) @ 10kHz=1.65E+03Ω, Impedance (0V Bias) @ 10MHz=1.77Ω, Impedance (0V Bias) @ 50kHz=335Ω, Impedance (0V Bias) @ 50MHz=0.285Ω, Impedance (0V Bias) @ 100Hz=1.57E+05Ω, Impedance (0V Bias) @ 100kHz=169Ω, Impedance (0V Bias) @ 100MHz=0.0835Ω, Impedance (0V Bias) @ 500Hz=3.19E+04Ω, Impedance (0V Bias) @ 500kHz=34.3Ω, Impedance (0V Bias) @ 500MHz=0.751Ω, Manufacturer Part Number=CL05B103KB5NNNC, RoHS=Yes, Supplier 1=LCSC, Supplier Part Number 1=C15195
C2: "Capacitor, Ceramic (MLCC), 100nF, ±10%, 50V, X7R, ±10%, SMD 0402", Capacitance=100nF, Capacitance @ 1.2V DC Bias=105.639nF, Capacitance @ 1.5V DC Bias=105.528nF, Capacitance @ 1.8V DC Bias=105.317nF, Capacitance @ 1.35V DC Bias=105.594nF, Capacitance @ 1V DC Bias=105.687nF, Capacitance @ 2.5V DC Bias=104.216nF, Capacitance @ 3.3V DC Bias=102.385nF, Capacitance @ 3.7V DC Bias=101.236nF, Capacitance @ 4.2V DC Bias=99.650nF, Capacitance @ 5V DC Bias=96.918nF, Capacitance @ 9V DC Bias=81.073nF, Capacitance @ 12V DC Bias=69.786nF, Capacitance @ 15V DC Bias=59.475nF, Capacitance @ 24V DC Bias=38.112nF, Capacitance @ 36V DC Bias=23.027nF, Capacitance @ 48V DC Bias=16.035nF, JLCPCB Basic Part=Yes, JLCPCB Part Number=C307331, Manufacturer="Samsung Electro-Mechanics", Package Size=0402, Temperature Coefficient=X7R, Temperature Rating="-55°C ~ 125°C", Tolerance=±10%, Voltage Rating=50V, Category="Capacitors - MLCC", ComponentLink1Description=Datasheet, ComponentLink1URL=https://wmsc.lcsc.com/wmsc/upload/file/pdf/v2/lcsc/2304140030_Samsung-Electro-Mechanics-CL05B104KB54PNC_C307331.pdf, ComponentLink2Description="JLCPCB Part URL", ComponentLink2URL=https://jlcpcb.com/partdetail/C307331, ComponentLink3Description="LCSC Part URL", ComponentLink3URL=https://lcsc.com/product-detail/Multilayer-Ceramic-Capacitors-MLCC---SMD-SMT_Samsung-Electro-Mechanics-Samsung-Electro-Mechanics-CL05B104KB54PNC_C307331.html, ComponentLink4Description="Samsung Component Library", ComponentLink4URL=https://weblib.samsungsem.com/mlcc/mlcc-ec.do?partNumber=CL05B104KB54PN, Impedance (0V Bias) @ 1GHz=0.87Ω, Impedance (0V Bias) @ 1kHz=1.7E+03Ω, Impedance (0V Bias) @ 1MHz=1.84Ω, Impedance (0V Bias) @ 2GHz=2Ω, Impedance (0V Bias) @ 5GHz=3.96Ω, Impedance (0V Bias) @ 5kHz=346Ω, Impedance (0V Bias) @ 5MHz=0.366Ω, Impedance (0V Bias) @ 10kHz=175Ω, Impedance (0V Bias) @ 10MHz=0.172Ω, Impedance (0V Bias) @ 50kHz=35.5Ω, Impedance (0V Bias) @ 50MHz=0.0626Ω, Impedance (0V Bias) @ 100Hz=1.66E+04Ω, Impedance (0V Bias) @ 100kHz=17.9Ω, Impedance (0V Bias) @ 100MHz=0.128Ω, Impedance (0V Bias) @ 500Hz=3.38E+03Ω, Impedance (0V Bias) @ 500kHz=3.64Ω, Impedance (0V Bias) @ 500MHz=0.487Ω, Manufacturer Part Number=CL05B104KB54PNC, RoHS=Yes, Supplier 1=LCSC, Supplier Part Number 1=C307331
C3: "Capacitor, Ceramic (MLCC), 1uF, ±10%, 25V, X5R, ±10%, SMD 0402", Capacitance=1uF, Capacitance @ 1.2V DC Bias=0.983uF, Capacitance @ 1.5V DC Bias=0.932uF, Capacitance @ 1.8V DC Bias=0.879uF, Capacitance @ 1.35V DC Bias=0.958uF, Capacitance @ 1V DC Bias=1.014uF, Capacitance @ 2.5V DC Bias=0.755uF, Capacitance @ 3.3V DC Bias=0.618uF, Capacitance @ 3.7V DC Bias=0.562uF, Capacitance @ 4.2V DC Bias=0.501uF, Capacitance @ 5V DC Bias=0.420uF, Capacitance @ 9V DC Bias=0.204uF, Capacitance @ 12V DC Bias=0.147uF, Capacitance @ 15V DC Bias=0.107uF, Capacitance @ 24V DC Bias=0.061uF, JLCPCB Basic Part=Yes, JLCPCB Part Number=C52923, Manufacturer="Samsung Electro-Mechanics", Package Size=0402, Temperature Coefficient=X5R, Temperature Rating="-55°C ~ 85°C", Tolerance=±10%, Voltage Rating=25V, Category="Capacitors - MLCC", ComponentLink1Description=Datasheet, ComponentLink1URL=https://wmsc.lcsc.com/wmsc/upload/file/pdf/v2/lcsc/2304140030_Samsung-Electro-Mechanics-CL05A105KA5NQNC_C52923.pdf, ComponentLink2Description="JLCPCB Part URL", ComponentLink2URL=https://jlcpcb.com/partdetail/C52923, ComponentLink3Description="LCSC Part URL", ComponentLink3URL=https://lcsc.com/product-detail/Multilayer-Ceramic-Capacitors-MLCC---SMD-SMT_Samsung-Electro-Mechanics-Samsung-Electro-Mechanics-CL05A105KA5NQNC_C52923.html, ComponentLink4Description="Samsung Component Library", ComponentLink4URL=https://weblib.samsungsem.com/mlcc/mlcc-ec.do?partNumber=CL05A105KA5NQN, Impedance (0V Bias) @ 1GHz=0.812Ω, Impedance (0V Bias) @ 1kHz=204Ω, Impedance (0V Bias) @ 1MHz=0.234Ω, Impedance (0V Bias) @ 2GHz=1.8Ω, Impedance (0V Bias) @ 5GHz=3.57Ω, Impedance (0V Bias) @ 5kHz=42Ω, Impedance (0V Bias) @ 5MHz=0.0392Ω, Impedance (0V Bias) @ 10kHz=21.3Ω, Impedance (0V Bias) @ 10MHz=0.0118Ω, Impedance (0V Bias) @ 50kHz=4.4Ω, Impedance (0V Bias) @ 50MHz=0.0671Ω, Impedance (0V Bias) @ 100Hz=1.95E+03Ω, Impedance (0V Bias) @ 100kHz=2.23Ω, Impedance (0V Bias) @ 100MHz=0.118Ω, Impedance (0V Bias) @ 500Hz=402Ω, Impedance (0V Bias) @ 500kHz=0.462Ω, Impedance (0V Bias) @ 500MHz=0.452Ω, Impedance (25V Bias) @ 1GHz=0.82Ω, Impedance (25V Bias) @ 1kHz=2.65E+03Ω, Impedance (25V Bias) @ 1MHz=2.7Ω, Impedance (25V Bias) @ 2GHz=1.85Ω, Impedance (25V Bias) @ 5GHz=3.51Ω, Impedance (25V Bias) @ 5kHz=533Ω, Impedance (25V Bias) @ 5MHz=0.621Ω, Impedance (25V Bias) @ 10kHz=267Ω, Impedance (25V Bias) @ 10MHz=0.298Ω, Impedance (25V Bias) @ 50kHz=53.8Ω, Impedance (25V Bias) @ 50MHz=0.0523Ω, Impedance (25V Bias) @ 100Hz=2.62E+04Ω, Impedance (25V Bias) @ 100kHz=27Ω, Impedance (25V Bias) @ 100MHz=0.113Ω, Impedance (25V Bias) @ 500Hz=5.28E+03Ω, Impedance (25V Bias) @ 500kHz=5.42Ω, Impedance (25V Bias) @ 500MHz=0.451Ω, Manufacturer Part Number=CL05A105KA5NQNC, RoHS=Yes, Supplier 1=LCSC, Supplier Part Number 1=C52923
C5: "Capacitor, Ceramic (MLCC), 4.7uF, ±20%, 10V, X5R, ±20%, SMD 0402", Capacitance=4.7uF, Capacitance @ 1.2V DC Bias=3.816uF, Capacitance @ 1.5V DC Bias=3.450uF, Capacitance @ 1.8V DC Bias=3.100uF, Capacitance @ 1.35V DC Bias=3.633uF, Capacitance @ 1V DC Bias=4.048uF, Capacitance @ 2.5V DC Bias=2.453uF, Capacitance @ 3.3V DC Bias=1.872uF, Capacitance @ 3.7V DC Bias=1.663uF, Capacitance @ 4.2V DC Bias=1.455uF, Capacitance @ 5V DC Bias=1.191uF, Capacitance @ 9V DC Bias=0.548uF, JLCPCB Basic Part=Yes, JLCPCB Part Number=C23733, Manufacturer="Samsung Electro-Mechanics", Package Size=0402, Temperature Coefficient=X5R, Temperature Rating="-55°C ~ 85°C", Tolerance=±20%, Voltage Rating=10V, Category="Capacitors - MLCC", ComponentLink1Description=Datasheet, ComponentLink1URL=https://wmsc.lcsc.com/wmsc/upload/file/pdf/v2/lcsc/2304140030_Samsung-Electro-Mechanics-CL05A475MP5NRNC_C23733.pdf, ComponentLink2Description="JLCPCB Part URL", ComponentLink2URL=https://jlcpcb.com/partdetail/C23733, ComponentLink3Description="LCSC Part URL", ComponentLink3URL=https://lcsc.com/product-detail/Multilayer-Ceramic-Capacitors-MLCC---SMD-SMT_Samsung-Electro-Mechanics-Samsung-Electro-Mechanics-CL05A475MP5NRNC_C23733.html, ComponentLink4Description="Samsung Component Library", ComponentLink4URL=https://weblib.samsungsem.com/mlcc/mlcc-ec.do?partNumber=CL05A475MP5NRN, Impedance (0V Bias) @ 1GHz=0.66Ω, Impedance (0V Bias) @ 1kHz=45.6Ω, Impedance (0V Bias) @ 1MHz=0.0479Ω, Impedance (0V Bias) @ 2GHz=1.52Ω, Impedance (0V Bias) @ 5GHz=3.05Ω, Impedance (0V Bias) @ 5kHz=9.34Ω, Impedance (0V Bias) @ 5MHz=0.00709Ω, Impedance (0V Bias) @ 10kHz=4.72Ω, Impedance (0V Bias) @ 10MHz=0.0183Ω, Impedance (0V Bias) @ 50kHz=0.964Ω, Impedance (0V Bias) @ 50MHz=0.06Ω, Impedance (0V Bias) @ 100Hz=442Ω, Impedance (0V Bias) @ 100kHz=0.486Ω, Impedance (0V Bias) @ 100MHz=0.102Ω, Impedance (0V Bias) @ 500Hz=90.2Ω, Impedance (0V Bias) @ 500kHz=0.0987Ω, Impedance (0V Bias) @ 500MHz=0.377Ω, Impedance (10V Bias) @ 1GHz=0.673Ω, Impedance (10V Bias) @ 1kHz=338Ω, Impedance (10V Bias) @ 1MHz=0.344Ω, Impedance (10V Bias) @ 2GHz=1.52Ω, Impedance (10V Bias) @ 5GHz=3.06Ω, Impedance (10V Bias) @ 5kHz=68.2Ω, Impedance (10V Bias) @ 5MHz=0.0603Ω, Impedance (10V Bias) @ 10kHz=34.2Ω, Impedance (10V Bias) @ 10MHz=0.0164Ω, Impedance (10V Bias) @ 50kHz=6.88Ω, Impedance (10V Bias) @ 50MHz=0.064Ω, Impedance (10V Bias) @ 100Hz=3.34E+03Ω, Impedance (10V Bias) @ 100kHz=3.45Ω, Impedance (10V Bias) @ 100MHz=0.105Ω, Impedance (10V Bias) @ 500Hz=674Ω, Impedance (10V Bias) @ 500kHz=0.693Ω, Impedance (10V Bias) @ 500MHz=0.385Ω, Manufacturer Part Number=CL05A475MP5NRNC, RoHS=Yes, Supplier 1=LCSC, Supplier Part Number 1=C23733
C6 C7 C18 C23: "Capacitor, Ceramic (MLCC), 100nF, ±10%, 16V, X7R, ±10%, SMD 0402", Capacitance=100nF, Capacitance @ 1.2V DC Bias=104.598nF, Capacitance @ 1.5V DC Bias=104.372nF, Capacitance @ 1.8V DC Bias=104.042nF, Capacitance @ 1.35V DC Bias=104.495nF, Capacitance @ 1V DC Bias=104.721nF, Capacitance @ 2.5V DC Bias=102.634nF, Capacitance @ 3.3V DC Bias=100.452nF, Capacitance @ 3.7V DC Bias=99.160nF, Capacitance @ 4.2V DC Bias=97.441nF, Capacitance @ 5V DC Bias=94.577nF, Capacitance @ 9V DC Bias=78.638nF, Capacitance @ 12V DC Bias=66.291nF, Capacitance @ 15V DC Bias=54.779nF, JLCPCB Basic Part=Yes, JLCPCB Part Number=C1525, Manufacturer="Samsung Electro-Mechanics", Package Size=0402, Temperature Coefficient=X7R, Temperature Rating="-55°C ~ 125°C", Tolerance=±10%, Voltage Rating=16V, Category="Capacitors - MLCC", ComponentLink1Description=Datasheet, ComponentLink1URL=https://wmsc.lcsc.com/wmsc/upload/file/pdf/v2/lcsc/2304140030_Samsung-Electro-Mechanics-CL05B104KO5NNNC_C1525.pdf, ComponentLink2Description="JLCPCB Part URL", ComponentLink2URL=https://jlcpcb.com/partdetail/C1525, ComponentLink3Description="LCSC Part URL", ComponentLink3URL=https://lcsc.com/product-detail/Multilayer-Ceramic-Capacitors-MLCC---SMD-SMT_Samsung-Electro-Mechanics-Samsung-Electro-Mechanics-CL05B104KO5NNNC_C1525.html, ComponentLink4Description="Samsung Component Library", ComponentLink4URL=https://weblib.samsungsem.com/mlcc/mlcc-ec.do?partNumber=CL05B104KO5NNN, Impedance (0V Bias) @ 1GHz=0.97Ω, Impedance (0V Bias) @ 1kHz=1.75E+03Ω, Impedance (0V Bias) @ 1MHz=1.87Ω, Impedance (0V Bias) @ 2GHz=2.26Ω, Impedance (0V Bias) @ 5GHz=4.75Ω, Impedance (0V Bias) @ 5kHz=356Ω, Impedance (0V Bias) @ 5MHz=0.373Ω, Impedance (0V Bias) @ 10kHz=179Ω, Impedance (0V Bias) @ 10MHz=0.175Ω, Impedance (0V Bias) @ 50kHz=36.4Ω, Impedance (0V Bias) @ 50MHz=0.064Ω, Impedance (0V Bias) @ 100Hz=1.71E+04Ω, Impedance (0V Bias) @ 100kHz=18.3Ω, Impedance (0V Bias) @ 100MHz=0.122Ω, Impedance (0V Bias) @ 500Hz=3.48E+03Ω, Impedance (0V Bias) @ 500kHz=3.72Ω, Impedance (0V Bias) @ 500MHz=0.525Ω, Impedance (16V Bias) @ 1GHz=0.969Ω, Impedance (16V Bias) @ 1kHz=2.61E+03Ω, Impedance (16V Bias) @ 1MHz=2.76Ω, Impedance (16V Bias) @ 2GHz=2.25Ω, Impedance (16V Bias) @ 5GHz=4.7Ω, Impedance (16V Bias) @ 5kHz=529Ω, Impedance (16V Bias) @ 5MHz=0.587Ω, Impedance (16V Bias) @ 10kHz=266Ω, Impedance (16V Bias) @ 10MHz=0.277Ω, Impedance (16V Bias) @ 50kHz=54Ω, Impedance (16V Bias) @ 50MHz=0.0412Ω, Impedance (16V Bias) @ 100Hz=2.55E+04Ω, Impedance (16V Bias) @ 100kHz=27.2Ω, Impedance (16V Bias) @ 100MHz=0.133Ω, Impedance (16V Bias) @ 500Hz=5.18E+03Ω, Impedance (16V Bias) @ 500kHz=5.5Ω, Impedance (16V Bias) @ 500MHz=0.524Ω, Manufacturer Part Number=CL05B104KO5NNNC, RoHS=Yes, Supplier 1=LCSC, Supplier Part Number 1=C1525
C9A C9B: "Capacitor, Ceramic (MLCC), 100nF, ±10%, 50V, X7R, ±10%, SMD 0805", Capacitance=100nF, JLCPCB Basic Part=Yes, JLCPCB Part Number=C49678, Manufacturer=YAGEO, Package Size=0805, Temperature Coefficient=X7R, Tolerance=±10%, Voltage Rating=50V, Category="Capacitors - MLCC", ComponentLink1Description=Datasheet, ComponentLink1URL=https://wmsc.lcsc.com/wmsc/upload/file/pdf/v2/lcsc/2304140030_YAGEO-CC0805KRX7R9BB104_C49678.pdf, ComponentLink2Description="JLCPCB Part URL", ComponentLink2URL=https://jlcpcb.com/partdetail/C49678, ComponentLink3Description="LCSC Part URL", ComponentLink3URL=https://lcsc.com/product-detail/Multilayer-Ceramic-Capacitors-MLCC---SMD-SMT_YAGEO-YAGEO-CC0805KRX7R9BB104_C49678.html, Manufacturer Part Number=CC0805KRX7R9BB104, RoHS=Yes, Supplier 1=LCSC, Supplier Part Number 1=C49678
C10A C10B: "Capacitor, Ceramic (MLCC), 1nF, ±10%, 50V, X7R, ±10%, SMD 0805", Capacitance=1nF, Capacitance @ 1.2V DC Bias=1.008nF, Capacitance @ 1.5V DC Bias=1.009nF, Capacitance @ 1.8V DC Bias=1.011nF, Capacitance @ 1V DC Bias=1.006nF, Capacitance @ 2.5V DC Bias=1.013nF, Capacitance @ 3.3V DC Bias=1.014nF, Capacitance @ 3.7V DC Bias=1.015nF, Capacitance @ 4.2V DC Bias=1.017nF, Capacitance @ 5V DC Bias=1.018nF, Capacitance @ 9V DC Bias=1.022nF, Capacitance @ 12V DC Bias=1.021nF, Capacitance @ 15V DC Bias=1.020nF, Capacitance @ 24V DC Bias=1.012nF, Capacitance @ 36V DC Bias=0.995nF, Capacitance @ 48V DC Bias=0.975nF, JLCPCB Basic Part=Yes, JLCPCB Part Number=C46653, Manufacturer="Samsung Electro-Mechanics", Package Size=0805, Temperature Coefficient=X7R, Temperature Rating="-55°C ~ 125°C", Tolerance=±10%, Voltage Rating=50V, Capacitance @ 1.35V DC Bias=1.009nF, Category="Capacitors - MLCC", ComponentLink1Description=Datasheet, ComponentLink1URL=https://wmsc.lcsc.com/wmsc/upload/file/pdf/v2/lcsc/2304140030_Samsung-Electro-Mechanics-CL21B102KBCNNNC_C46653.pdf, ComponentLink2Description="JLCPCB Part URL", ComponentLink2URL=https://jlcpcb.com/partdetail/C46653, ComponentLink3Description="LCSC Part URL", ComponentLink3URL=https://lcsc.com/product-detail/Multilayer-Ceramic-Capacitors-MLCC---SMD-SMT_Samsung-Electro-Mechanics-Samsung-Electro-Mechanics-CL21B102KBCNNNC_C46653.html, ComponentLink4Description="Samsung Component Library", ComponentLink4URL=https://weblib.samsungsem.com/mlcc/mlcc-ec.do?partNumber=CL21B102KBCNNN, Impedance (0V Bias) @ 1GHz=3.83Ω, Impedance (0V Bias) @ 1kHz=1.43E+05Ω, Impedance (0V Bias) @ 1MHz=155Ω, Impedance (0V Bias) @ 2GHz=12.4Ω, Impedance (0V Bias) @ 5GHz=7.64Ω, Impedance (0V Bias) @ 5kHz=2.92E+04Ω, Impedance (0V Bias) @ 5MHz=31.6Ω, Impedance (0V Bias) @ 10kHz=1.47E+04Ω, Impedance (0V Bias) @ 10MHz=15.9Ω, Impedance (0V Bias) @ 50kHz=3E+03Ω, Impedance (0V Bias) @ 50MHz=3.25Ω, Impedance (0V Bias) @ 100Hz=1.39E+06Ω, Impedance (0V Bias) @ 100kHz=1.51E+03Ω, Impedance (0V Bias) @ 100MHz=1.41Ω, Impedance (0V Bias) @ 500Hz=2.85E+05Ω, Impedance (0V Bias) @ 500kHz=307Ω, Impedance (0V Bias) @ 500MHz=1.58Ω, Manufacturer Part Number=CL21B102KBCNNNC, RoHS=Yes, Supplier 1=LCSC, Supplier Part Number 1=C46653
C15: library part CL05B104KO5NNNC, Manufacturer_Name=SAMSUNG, Mouser Part Number=187-CL05B104KO5NNNC, Arrow Part Number=CL05B104KO5NNNC, Arrow Price/Stock=https://www.arrow.com/en/products/cl05b104ko5nnnc/samsung-electro-mechanics?utm_currency=USD&region=europe, Datasheet Link=https://datasheet.datasheetarchive.com/originals/distributors/Datasheets-DGA10/2408147.pdf, Height=0.55mm, Manufacturer_Part_Number=CL05B104KO5NNNC, Mouser Price/Stock=https://www.mouser.co.uk/ProductDetail/Samsung-Electro-Mechanics/CL05B104KO5NNNC?qs=hqM3L16%252BxlfT2SKOuAUq6Q%3D%3D
C16 C17: "Capacitor, Ceramic (MLCC), 2.2uF, ±20%, 6.3V, X5R, ±20%, SMD 0402", Capacitance=2.2uF, Capacitance @ 1.2V DC Bias=1.921uF, Capacitance @ 1.5V DC Bias=1.764uF, Capacitance @ 1.8V DC Bias=1.611uF, Capacitance @ 1.35V DC Bias=1.843uF, Capacitance @ 1V DC Bias=2.019uF, Capacitance @ 2.5V DC Bias=1.302uF, Capacitance @ 3.3V DC Bias=1.004uF, Capacitance @ 3.7V DC Bias=0.893uF, Capacitance @ 4.2V DC Bias=0.780uF, Capacitance @ 5V DC Bias=0.638uF, JLCPCB Basic Part=Yes, JLCPCB Part Number=C12530, Manufacturer="Samsung Electro-Mechanics", Package Size=0402, Temperature Coefficient=X5R, Temperature Rating="-55°C ~ 85°C", Tolerance=±20%, Voltage Rating=6.3V, Category="Capacitors - MLCC", ComponentLink1Description=Datasheet, ComponentLink1URL=https://wmsc.lcsc.com/wmsc/upload/file/pdf/v2/lcsc/2304140030_Samsung-Electro-Mechanics-CL05A225MQ5NSNC_C12530.pdf, ComponentLink2Description="JLCPCB Part URL", ComponentLink2URL=https://jlcpcb.com/partdetail/C12530, ComponentLink3Description="LCSC Part URL", ComponentLink3URL=https://lcsc.com/product-detail/Multilayer-Ceramic-Capacitors-MLCC---SMD-SMT_Samsung-Electro-Mechanics-Samsung-Electro-Mechanics-CL05A225MQ5NSNC_C12530.html, ComponentLink4Description="Samsung Component Library", ComponentLink4URL=https://weblib.samsungsem.com/mlcc/mlcc-ec.do?partNumber=CL05A225MQ5NSN, Impedance (0V Bias) @ 1GHz=0.858Ω, Impedance (0V Bias) @ 1kHz=97.4Ω, Impedance (0V Bias) @ 1MHz=0.107Ω, Impedance (0V Bias) @ 2GHz=1.87Ω, Impedance (0V Bias) @ 5GHz=3.69Ω, Impedance (0V Bias) @ 5kHz=20Ω, Impedance (0V Bias) @ 5MHz=0.0123Ω, Impedance (0V Bias) @ 10kHz=10.1Ω, Impedance (0V Bias) @ 10MHz=0.0171Ω, Impedance (0V Bias) @ 50kHz=2.08Ω, Impedance (0V Bias) @ 50MHz=0.0697Ω, Impedance (0V Bias) @ 100Hz=935Ω, Impedance (0V Bias) @ 100kHz=1.05Ω, Impedance (0V Bias) @ 100MHz=0.123Ω, Impedance (0V Bias) @ 500Hz=192Ω, Impedance (0V Bias) @ 500kHz=0.214Ω, Impedance (0V Bias) @ 500MHz=0.484Ω, Manufacturer Part Number=CL05A225MQ5NSNC, RoHS=Yes, Supplier 1=LCSC, Supplier Part Number 1=C12530
C19 C20 C21: "Capacitor, Ceramic (MLCC), 10uF, ±20%, 6.3V, X5R, ±20%, SMD 0402", Capacitance=10uF, Capacitance @ 1.2V DC Bias=7.392uF, Capacitance @ 1.5V DC Bias=6.639uF, Capacitance @ 1.8V DC Bias=5.875uF, Capacitance @ 1.35V DC Bias=7.025uF, Capacitance @ 1V DC Bias=7.816uF, Capacitance @ 2.5V DC Bias=4.552uF, Capacitance @ 3.3V DC Bias=3.499uF, Capacitance @ 3.7V DC Bias=3.122uF, Capacitance @ 4.2V DC Bias=2.720uF, Capacitance @ 5V DC Bias=2.236uF, JLCPCB Basic Part=Yes, JLCPCB Part Number=C15525, Manufacturer="Samsung Electro-Mechanics", Package Size=0402, Temperature Coefficient=X5R, Temperature Rating="-55°C ~ 85°C", Tolerance=±20%, Voltage Rating=6.3V, Category="Capacitors - MLCC", ComponentLink1Description=Datasheet, ComponentLink1URL=https://wmsc.lcsc.com/wmsc/upload/file/pdf/v2/lcsc/2208231630_Samsung-Electro-Mechanics-CL05A106MQ5NUNC_C15525.pdf, ComponentLink2Description="JLCPCB Part URL", ComponentLink2URL=https://jlcpcb.com/partdetail/C15525, ComponentLink3Description="LCSC Part URL", ComponentLink3URL=https://lcsc.com/product-detail/Multilayer-Ceramic-Capacitors-MLCC---SMD-SMT_Samsung-Electro-Mechanics-Samsung-Electro-Mechanics-CL05A106MQ5NUNC_C15525.html, ComponentLink4Description="Samsung Component Library", ComponentLink4URL=https://weblib.samsungsem.com/mlcc/mlcc-ec.do?partNumber=CL05A106MQ5NUN, Impedance (0V Bias) @ 1GHz=0.567Ω, Impedance (0V Bias) @ 1kHz=25.3Ω, Impedance (0V Bias) @ 1MHz=0.026Ω, Impedance (0V Bias) @ 2GHz=1.33Ω, Impedance (0V Bias) @ 5GHz=2.66Ω, Impedance (0V Bias) @ 5kHz=5.23Ω, Impedance (0V Bias) @ 5MHz=0.012Ω, Impedance (0V Bias) @ 10kHz=2.64Ω, Impedance (0V Bias) @ 10MHz=0.0181Ω, Impedance (0V Bias) @ 50kHz=0.544Ω, Impedance (0V Bias) @ 50MHz=0.0531Ω, Impedance (0V Bias) @ 100Hz=243Ω, Impedance (0V Bias) @ 100kHz=0.275Ω, Impedance (0V Bias) @ 100MHz=0.09Ω, Impedance (0V Bias) @ 500Hz=50Ω, Impedance (0V Bias) @ 500kHz=0.0554Ω, Impedance (0V Bias) @ 500MHz=0.323Ω, Manufacturer Part Number=CL05A106MQ5NUNC, RoHS=Yes, Supplier 1=LCSC, Supplier Part Number 1=C15525
C22: library part CMP-03913-53914714-2, "Cap Cer 0.68UF 10V X5R 0603", Capacitance=680nF, Case Code (Imperial)=0603, Case Code (Metric)=1608, Dielectric=X5R, Insulation Resistance=200MΩ, Max Operating Temperature=85°C, Min Operating Temperature=-55°C, Tolerance=20%, Voltage Rating=10V, Case/Package=0603, Height=800µm, Length=1.6mm, Mount="Surface Mount", Packaging="Tape & Reel (TR)", RoHS=Compliant, Thickness=939.8µm, Voltage Rating (DC)=10V, Width=800µm
C24: "68 pF Â±5% 25V Ceramic Capacitor C0G, NP0 0201 (0603 Metric)", Package="0603 Taiyo Yuden", Check_prices=https://www.snapeda.com/parts/CGA1A2C0G1E680J030BA/TDK/view-part/?ref=eda, MF=TDK, MP=CGA1A2C0G1E680J030BA, SnapEDA_Link=https://www.snapeda.com/parts/CGA1A2C0G1E680J030BA/TDK/view-part/?ref=snap
C25: "Capacitor, Ceramic (MLCC), 47uF, ±20%, 6.3V, X5R, ±20%, SMD 0805", Capacitance=47uF, Capacitance @ 1.2V DC Bias=35.744uF, Capacitance @ 1.5V DC Bias=32.775uF, Capacitance @ 1.8V DC Bias=29.885uF, Capacitance @ 1.35V DC Bias=34.267uF, Capacitance @ 1V DC Bias=37.588uF, Capacitance @ 2.5V DC Bias=24.262uF, Capacitance @ 3.3V DC Bias=18.956uF, Capacitance @ 3.7V DC Bias=16.988uF, Capacitance @ 4.2V DC Bias=14.989uF, Capacitance @ 5V DC Bias=12.411uF, JLCPCB Basic Part=Yes, JLCPCB Part Number=C16780, Manufacturer="Samsung Electro-Mechanics", Package Size=0805, Temperature Coefficient=X5R, Temperature Rating="-55°C ~ 85°C", Tolerance=±20%, Voltage Rating=6.3V, Category="Capacitors - MLCC", ComponentLink1Description=Datasheet, ComponentLink1URL=https://wmsc.lcsc.com/wmsc/upload/file/pdf/v2/lcsc/2304140030_Samsung-Electro-Mechanics-CL21A476MQYNNNE_C16780.pdf, ComponentLink2Description="JLCPCB Part URL", ComponentLink2URL=https://jlcpcb.com/partdetail/C16780, ComponentLink3Description="LCSC Part URL", ComponentLink3URL=https://lcsc.com/product-detail/Multilayer-Ceramic-Capacitors-MLCC---SMD-SMT_Samsung-Electro-Mechanics-Samsung-Electro-Mechanics-CL21A476MQYNNNE_C16780.html, ComponentLink4Description="Samsung Component Library", ComponentLink4URL=https://weblib.samsungsem.com/mlcc/mlcc-ec.do?partNumber=CL21A476MQYNNN, Impedance (0V Bias) @ 1GHz=0.706Ω, Impedance (0V Bias) @ 1kHz=5.39Ω, Impedance (0V Bias) @ 1MHz=0.00305Ω, Impedance (0V Bias) @ 2GHz=1.8Ω, Impedance (0V Bias) @ 5GHz=2.67Ω, Impedance (0V Bias) @ 5kHz=1.11Ω, Impedance (0V Bias) @ 5MHz=0.0134Ω, Impedance (0V Bias) @ 10kHz=0.559Ω, Impedance (0V Bias) @ 10MHz=0.0218Ω, Impedance (0V Bias) @ 50kHz=0.115Ω, Impedance (0V Bias) @ 50MHz=0.0701Ω, Impedance (0V Bias) @ 100Hz=51.8Ω, Impedance (0V Bias) @ 100kHz=0.0576Ω, Impedance (0V Bias) @ 100MHz=0.113Ω, Impedance (0V Bias) @ 500Hz=10.7Ω, Impedance (0V Bias) @ 500kHz=0.00947Ω, Impedance (0V Bias) @ 500MHz=0.391Ω, Manufacturer Part Number=CL21A476MQYNNNE, RoHS=Yes, Supplier 1=LCSC, Supplier Part Number 1=C16780
D_Base1A D_Base1B: library part M7, "1A Independent Type 1kV 1.1V@1A SMA(DO-214AC) Diodes - General Purpose ROHS", Mfr_Name="Microdiode Electronics"
D_LED1 D_LED2 D_LEDA D_LEDB: library part CMP-44529-000070-1, "LED RED CLEAR SMD", Case Code (Imperial)=0805, Case Code (Metric)=2012, Color=Red, Forward Current=20mA, Forward Voltage=2V, Max Operating Temperature=85°C, Min Operating Temperature=-40°C, Package Quantity=2000, Case/Package=0805, Dominant Wavelength=625nm, Height=1.1mm, Illumination Color=Red, Lead Free="Lead Free", Length=2mm, Lens Style=Clear, Luminous Intensity=15mcd, Mount="Surface Mount", Packaging="Tape and Reel", RoHS Compliant=Yes, Test Current=20mA, Viewing Angle=120°, Wavelength=627nm, Width=1.25mm
Fuse1A Fuse1B: library part CMP-08604-000022-1, "FUSE HOLDER BLADE 80V PCB", Manufacturer=Littelfuse, Package=178.6165, Voltage Rating Ac=80V, Automotive=No, Category=Fuse, ComponentLink2Description=Datasheet, ComponentLink2URL=https://www.littelfuse.com/~/media/commercial-vehicle/datasheets/automotive-fuse-holders/ato/littelfuse-fuse-holder-ato-flr-pcb-datasheet.pdf, Conn Orientation=Vertical, Device Class L1="Circuit Protection", Device Class L2="Fuse Holders", Device Class L3=unset, Digikey Description="FUSE HOLDER BLADE 80V PCB", Height=17.5mm, Lead Free=Yes, Manufacturer Part Number=178.6165.0002, Mouser Description="Fuse Holder FLR (ATO) PCB 4-pin Holder", Number Of Fuses=1, Octopart=https://octopart.com/178.6165.0002-littelfuse-13138759, RoHS=TRUE, Standoff Height=1mm, Voltage Rating Dc=80V
H_OLED1 H_SD1: "4-pin Header 0.1mm pitch"
J1 J_MTR1A J_MTR1B: library part CMP-04776-000998-1, "CONN HEADER R/A 2POS", Case/Package=0201, Contact Resistance=10mR, Current Rating=5A, Max Operating Temperature=105°C, Max Voltage Rating (DC)=250.25kV, Min Operating Temperature=-40°C, Package Quantity=3168, Voltage Rating=250V, Contact Material=Brass, Contact Plating=Gold, Gender=Male, Glow Wire Compliant=Compliant, Halogen Free="Low Halogen", Housing Material=Thermoplastic, Mount="Through Hole", Number of Circuits=2, Number of Contacts=2, Number of Positions=2, Number of Rows=2, Orientation="Right Angle", Packaging=Tray, Pitch=3mm, Radiation Hardening=No, Row Spacing=3mm, Series=43045, Termination=Solder
J2: library part CMP-02766-001412-1, "CONN HEADER SMD 14POS 1.27MM", Housing Color=Black, Max Operating Temperature=125°C, Min Operating Temperature=-55°C, Contact Material=Bronze, Contact Plating=Gold, Depth=5.84mm, Gender=Male, Housing Material=Polymer, Lead Free="Lead Free", Length=8.89mm, Number of Contacts=14, Number of Rows=2, Orientation=Straight, Packaging=Rail/Tube, Pitch=1.27mm, Radiation Hardening=No, RoHS Compliant=Yes, Termination=Solder
L1: library part CMP-03913-148605660-1, "Power Inductor, 5.6UH, Shielded, 5.1A Rohs Compliant: Yes", Parameter 1=5.6uH
LDO_1: library part CMP-209535-000001-1, "LDO Voltage Regulators 1A, 3.3V", Dropout Voltage=1.1V, Manufacturer="Advanced Monolithic Systems", Max Junction Temp=+125°C, Max Power Dissipation=1.2W, Max Supply Voltage=15V, Nominal Supply Current=5mA, Output Current=1A, Output Voltage=3.3V, Package=AMS1117, Temperature="-40°C to +125°C", Temperature Range Low=-40°C, Automotive=No, Category=IC, ComponentLink2Description=Datasheet, ComponentLink2URL=http://www.advanced-monolithic.com/pdf/ds1117.pdf, Device Class L1="Integrated Circuits (ICs)", Device Class L2="Power Management ICs", Device Class L3="Voltage Regulators - Linear", Height=1.8mm, Ipc Land Pattern Name=SOT229P700X180-4, Lead Free=Yes, Manufacturer Part Number=AMS1117-3.3, Number Of Outputs=1, Octopart=https://octopart.com/ams1117-3.3-advanced+monolithic+systems-25899300, Output Type=Fixed, RoHS=TRUE, Standoff Height=0.64mm, Temperature Range High=+125°C
MICRO_SD1: "Standard Card Edge Connectors", Package=Package, Availability="Not in stock", Check_prices=https://www.snapeda.com/parts/TF-01A/HRO+Electronics+Co.%252C+Ltd./view-part/?ref=eda, MF="HRO Electronics Co., Ltd.", MP=TF-01A, Price=None, SnapEDA_Link=https://www.snapeda.com/parts/TF-01A/HRO+Electronics+Co.%252C+Ltd./view-part/?ref=snap
OLED1: JLCPCB Part Class="Extended Part", LCSC Part Name="0.96寸 白色 128x64像素分辨率 单色 30PIN", Manufacturer=Newvision(新智景), Add into BOM=yes, Convert to PCB=yes, Device=N096-2864KSWEG01-H30, Main Control Chip=SSD1306, Manufacturer Part=N096-2864KSWEG01-H30, Size=0.96, Supplier=LCSC, Supplier Footprint=-, Supplier Part=C2890596, Symbol=N096-2864KSWEG01-H30
Q1A Q1B: library part SS8050(RANGE:200-350)_C2150, "BJT NPN", Collector Cut-Off Current (Icbo)=100nA, Collector-Emitter Saturation Voltage (VCE(sat)@Ic,Ib)=500mV@800mA,80mA, DC Current Gain (hFE@Ic,Vce)=200@800mA,1V, JLCPCB Part Class="Basic Part", LCSC Part Name="NPN 电流:1.5A 耐压:25V hfe=200~350", Manufacturer=CJ(江苏长电/长晶), Manufacturer Part=SS8050(RANGE:200-350), Operating Temperature=-55℃~+150℃, Transition Frequency (fT)=100MHz, Add into BOM=yes, Convert to PCB=yes, Datasheet=https://atta.szlcsc.com/upload/public/pdf/source/20230322/AEE86F4B043774EFF80CAEA14A37D9E9.pdf, Device=SS8050(RANGE:200-350)_C2150, Supplier=LCSC, Supplier Footprint=SOT-23, Supplier Part=C2150, Symbol=SS8050_C2150